# EAGLE board seb_v1_panelized1 (EAGLE 7.7.0)
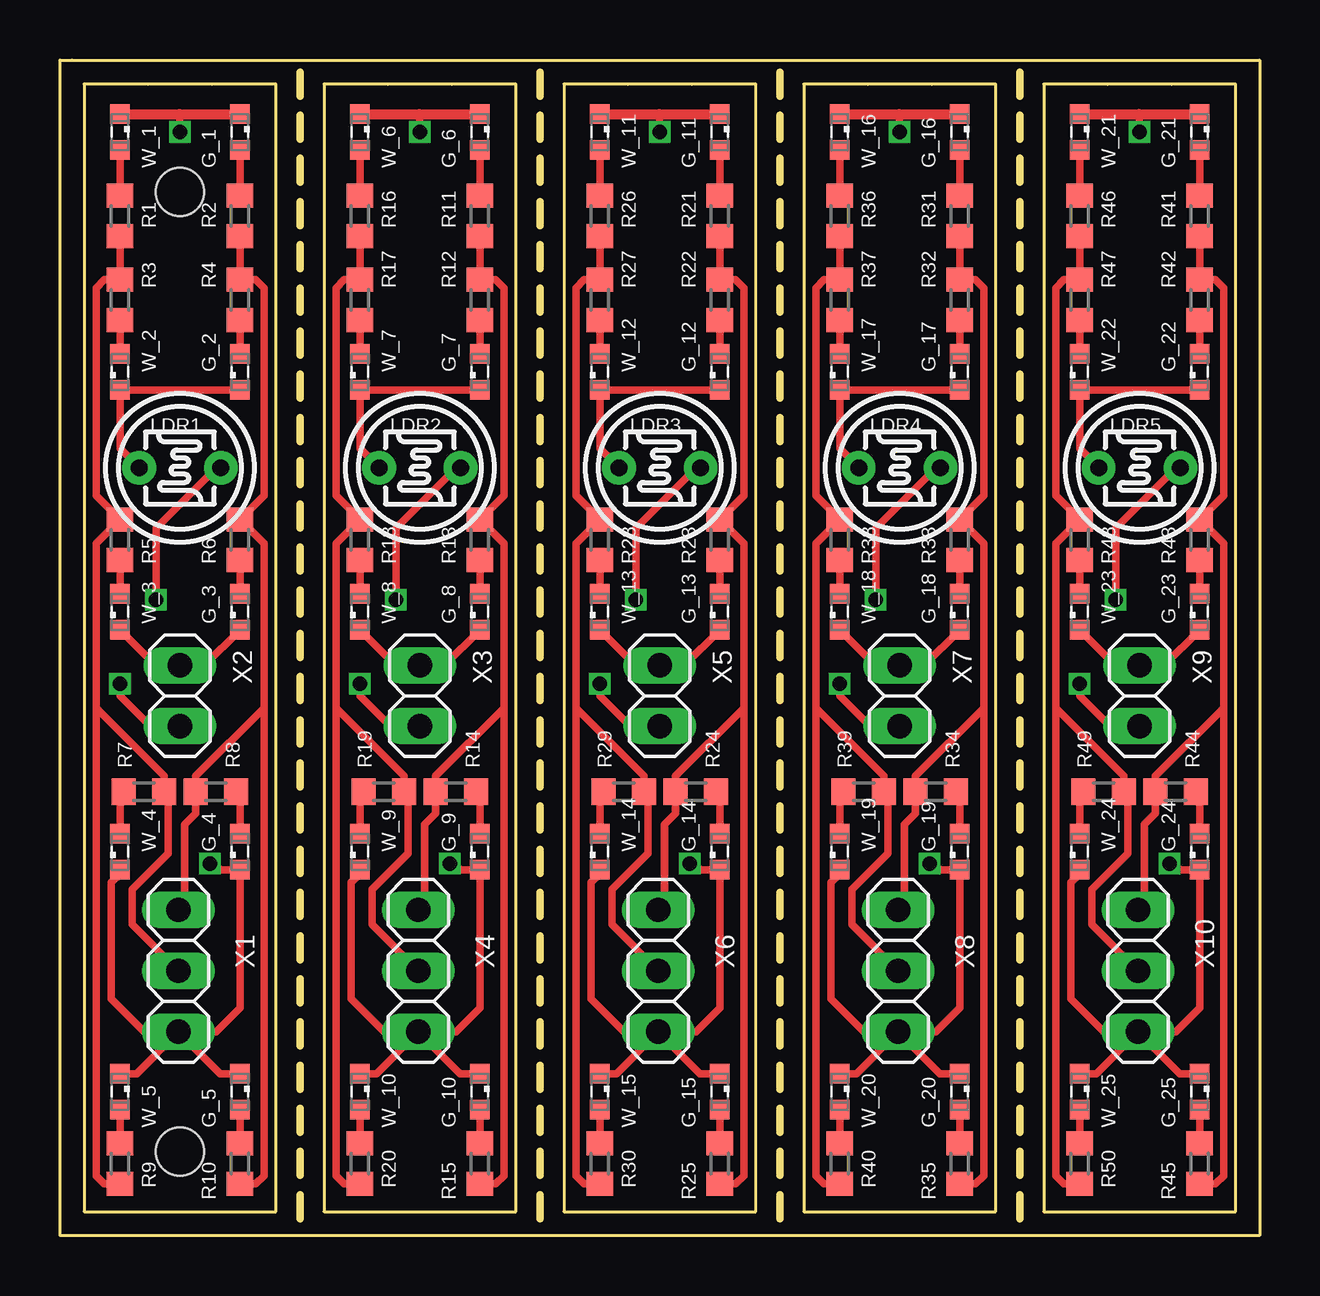
[diagram p0: board, top side]
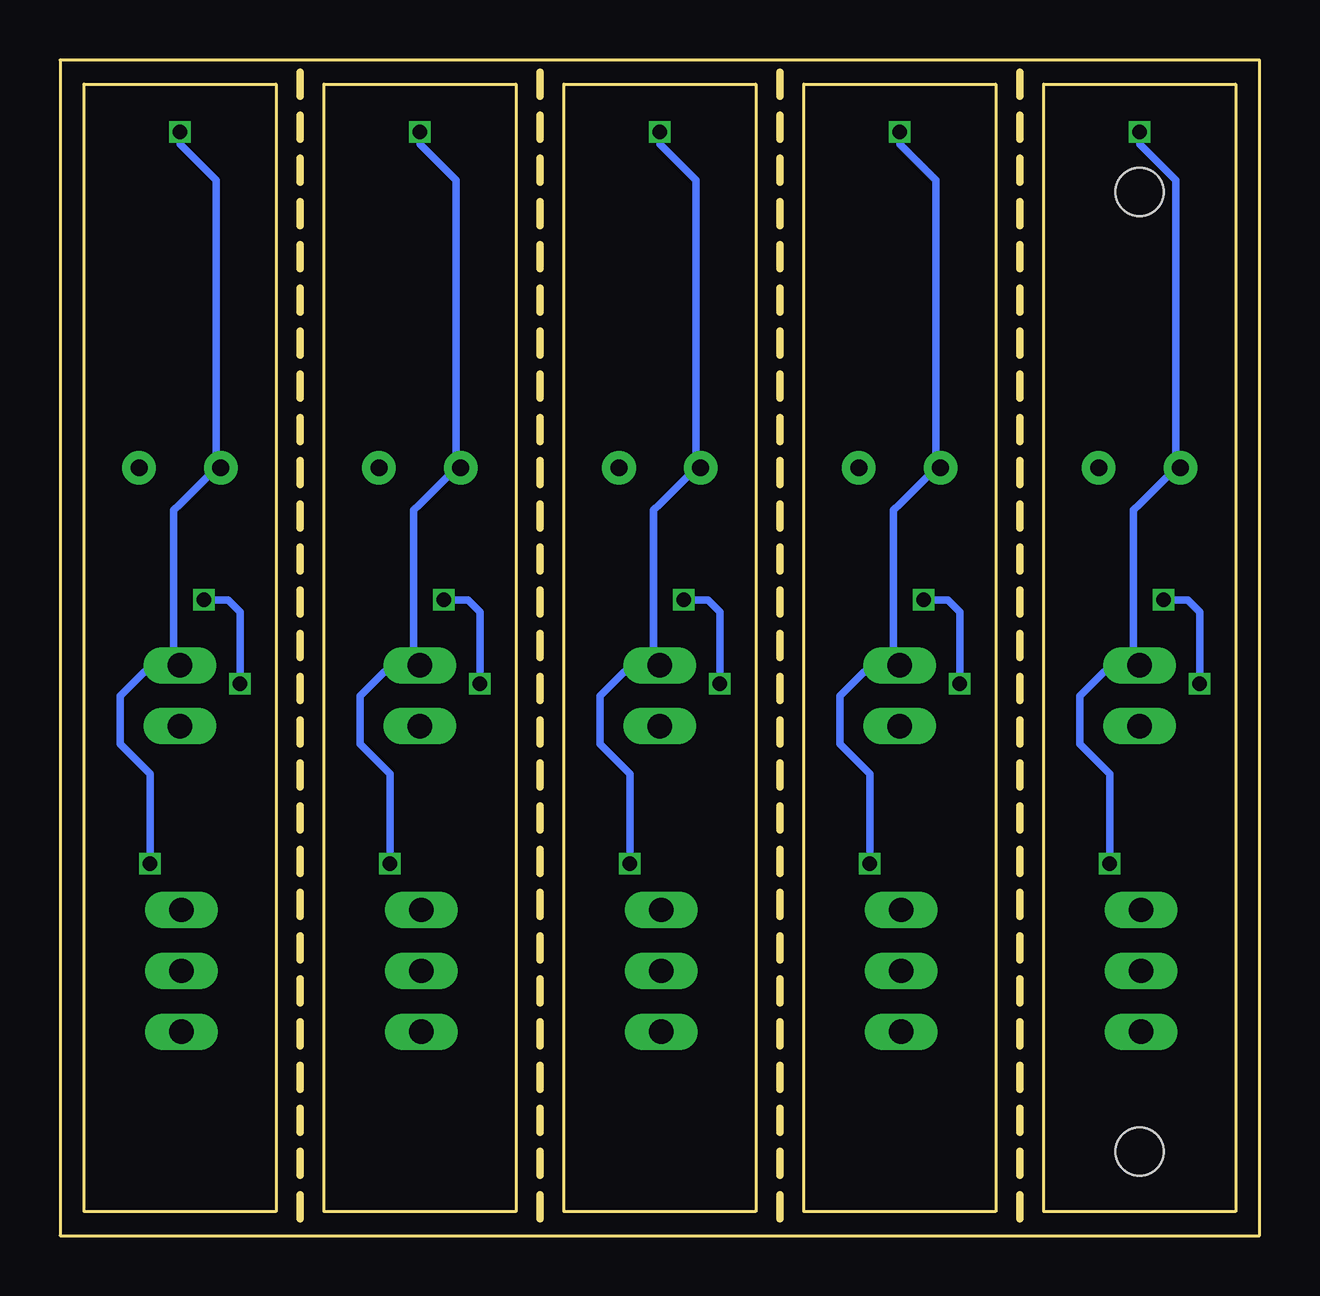
[diagram p1: board, bottom side, seen from below]

Size 50 x 49 mm. Coordinates in mm from the lower left corner, seen from the top.
Outline: 10,48.5 10,0.5
Outline: 20,48.5 20,0.5
Outline: 30,48.5 30,0.5
Outline: 40,48.5 40,0.5
Outline: 9,1 9,48 arc-1 1,48 1,1 9,1
Outline: 19,1 19,48 arc-1 11,48 11,1 19,1
Outline: 29,1 29,48 arc-1 21,48 21,1 29,1
Outline: 39,1 39,48 arc-1 31,48 31,1 39,1
Outline: 49,1 49,48 arc-1 41,48 41,1 49,1
Outline: 0.5,49 50,49 50,0 0,0 0,49 0.5,49
Copper layers (1*16): Top 0.035mm / dielectric 1.5mm / Bottom 0.035mm
Design rules "SeeedStudio_2layer_DRU_no_angle_20140221": minimum track width 6mil, minimum drill 12mil, track to track 6mil, track to pad 6mil, pad to pad 6mil, via to via 6mil, smd to smd 0mil, copper to edge 10mil, drill to drill 10mil, minimum pad ring 10mil, minimum via ring 6mil, stop-mask expansion 2mil, vias tented up to drill 100mil, thermal gap 10mil
Holes 2 mm at 5,43.5 5,3.5

## Footprints (pad centres in the part's own frame; a part is rotated, then mirrored left to right if it is on the bottom)
SML0603 = smd 0.8 x 0.8: A 0.75,0; C -0.75,0
T0-46-A10XX = drill 0.7 pad 1.4: 1 -1.7,0; 2 1.7,0
R0603 = smd 1 x 1.1: 1 -0.85,0; 2 0.85,0
1X03 = drill 1.016 long: 1 -2.54,0; 2 0,0; 3 2.54,0
1X02 = drill 1.016 long: 1 -1.27,0; 2 1.27,0

## Placement (x,y rotation side)
G_1  [SML0603]  7.5,46 270 top
G_2  [SML0603]  7.5,36 90 top
G_3  [SML0603]  7.5,26 90 top
G_4  [SML0603]  7.5,16 90 top
G_5  [SML0603]  7.5,6 270 top
G_6  [SML0603]  17.5,46 270 top
G_7  [SML0603]  17.5,36 90 top
G_8  [SML0603]  17.5,26 90 top
G_9  [SML0603]  17.5,16 90 top
G_10  [SML0603]  17.5,6 270 top
G_11  [SML0603]  27.5,46 270 top
G_12  [SML0603]  27.5,36 90 top
G_13  [SML0603]  27.5,26 90 top
G_14  [SML0603]  27.5,16 90 top
G_15  [SML0603]  27.5,6 270 top
G_16  [SML0603]  37.5,46 270 top
G_17  [SML0603]  37.5,36 90 top
G_18  [SML0603]  37.5,26 90 top
G_19  [SML0603]  37.5,16 90 top
G_20  [SML0603]  37.5,6 270 top
G_21  [SML0603]  47.5,46 270 top
G_22  [SML0603]  47.5,36 90 top
G_23  [SML0603]  47.5,26 90 top
G_24  [SML0603]  47.5,16 90 top
G_25  [SML0603]  47.5,6 270 top
LDR1  A1050_09  [T0-46-A10XX]  5,32 180 top
LDR2  A1050_09  [T0-46-A10XX]  15,32 180 top
LDR3  A1050_09  [T0-46-A10XX]  25,32 180 top
LDR4  A1050_09  [T0-46-A10XX]  35,32 180 top
LDR5  A1050_09  [T0-46-A10XX]  45,32 180 top
R1  [R0603]  2.5,42.5 90 top
R2  [R0603]  7.5,42.5 90 top
R3  [R0603]  2.5,39 270 top
R4  [R0603]  7.5,39 270 top
R5  [R0603]  2.5,29 270 top
R6  [R0603]  7.5,29 270 top
R7  [R0603]  3.5,18.5 180 top
R8  [R0603]  6.5,18.5 0 top
R9  [R0603]  2.5,3 90 top
R10  [R0603]  7.5,3 90 top
R11  [R0603]  17.5,42.5 90 top
R12  [R0603]  17.5,39 270 top
R13  [R0603]  17.5,29 270 top
R14  [R0603]  16.5,18.5 0 top
R15  [R0603]  17.5,3 90 top
R16  [R0603]  12.5,42.5 90 top
R17  [R0603]  12.5,39 270 top
R18  [R0603]  12.5,29 270 top
R19  [R0603]  13.5,18.5 180 top
R20  [R0603]  12.5,3 90 top
R21  [R0603]  27.5,42.5 90 top
R22  [R0603]  27.5,39 270 top
R23  [R0603]  27.5,29 270 top
R24  [R0603]  26.5,18.5 0 top
R25  [R0603]  27.5,3 90 top
R26  [R0603]  22.5,42.5 90 top
R27  [R0603]  22.5,39 270 top
R28  [R0603]  22.5,29 270 top
R29  [R0603]  23.5,18.5 180 top
R30  [R0603]  22.5,3 90 top
R31  [R0603]  37.5,42.5 90 top
R32  [R0603]  37.5,39 270 top
R33  [R0603]  37.5,29 270 top
R34  [R0603]  36.5,18.5 0 top
R35  [R0603]  37.5,3 90 top
R36  [R0603]  32.5,42.5 90 top
R37  [R0603]  32.5,39 270 top
R38  [R0603]  32.5,29 270 top
R39  [R0603]  33.5,18.5 180 top
R40  [R0603]  32.5,3 90 top
R41  [R0603]  47.5,42.5 90 top
R42  [R0603]  47.5,39 270 top
R43  [R0603]  47.5,29 270 top
R44  [R0603]  46.5,18.5 0 top
R45  [R0603]  47.5,3 90 top
R46  [R0603]  42.5,42.5 90 top
R47  [R0603]  42.5,39 270 top
R48  [R0603]  42.5,29 270 top
R49  [R0603]  43.5,18.5 180 top
R50  [R0603]  42.5,3 90 top
W_1  [SML0603]  2.5,46 270 top
W_2  [SML0603]  2.5,36 90 top
W_3  [SML0603]  2.5,26 90 top
W_4  [SML0603]  2.5,16 90 top
W_5  [SML0603]  2.5,6 270 top
W_6  [SML0603]  12.5,46 270 top
W_7  [SML0603]  12.5,36 90 top
W_8  [SML0603]  12.5,26 90 top
W_9  [SML0603]  12.5,16 90 top
W_10  [SML0603]  12.5,6 270 top
W_11  [SML0603]  22.5,46 270 top
W_12  [SML0603]  22.5,36 90 top
W_13  [SML0603]  22.5,26 90 top
W_14  [SML0603]  22.5,16 90 top
W_15  [SML0603]  22.5,6 270 top
W_16  [SML0603]  32.5,46 270 top
W_17  [SML0603]  32.5,36 90 top
W_18  [SML0603]  32.5,26 90 top
W_19  [SML0603]  32.5,16 90 top
W_20  [SML0603]  32.5,6 270 top
W_21  [SML0603]  42.5,46 270 top
W_22  [SML0603]  42.5,36 90 top
W_23  [SML0603]  42.5,26 90 top
W_24  [SML0603]  42.5,16 90 top
W_25  [SML0603]  42.5,6 270 top
X1  [1X03]  4.94,11.03 90 top
X2  [1X02]  5,22.5 90 top
X3  [1X02]  15,22.5 90 top
X4  [1X03]  14.94,11.03 90 top
X5  [1X02]  25,22.5 90 top
X6  [1X03]  24.94,11.03 90 top
X7  [1X02]  35,22.5 90 top
X8  [1X03]  34.94,11.03 90 top
X9  [1X02]  45,22.5 90 top
X10  [1X03]  44.94,11.03 90 top

## Library data of the parts
G_1-G_25 W_1-W_25 = led
LDR1-LDR5 = photo-elements
R1-R50 = rcl
X1-X10 = pinhead

## Nets
G_+: R2.1 R4.1 R6.1 R8.1 R10.1 X1.3
G_+1: R11.1 R12.1 R13.1 R14.1 R15.1 X4.3
G_+2: R21.1 R22.1 R23.1 R24.1 R25.1 X6.3
G_+3: R31.1 R32.1 R33.1 R34.1 R35.1 X8.3
G_+4: R41.1 R42.1 R43.1 R44.1 R45.1 X10.3
GND: G_1.C G_2.C G_3.C G_4.C G_5.C LDR1.2 W_1.C W_2.C W_3.C W_4.C W_5.C X1.1 X2.2
GND1: G_6.C G_7.C G_8.C G_9.C G_10.C LDR2.2 W_6.C W_7.C W_8.C W_9.C W_10.C X3.2 X4.1
GND2: G_11.C G_12.C G_13.C G_14.C G_15.C LDR3.2 W_11.C W_12.C W_13.C W_14.C W_15.C X5.2 X6.1
GND3: G_16.C G_17.C G_18.C G_19.C G_20.C LDR4.2 W_16.C W_17.C W_18.C W_19.C W_20.C X7.2 X8.1
GND4: G_21.C G_22.C G_23.C G_24.C G_25.C LDR5.2 W_21.C W_22.C W_23.C W_24.C W_25.C X9.2 X10.1
N$1: G_1.A R2.2
N$2: G_2.A R4.2
N$3: G_3.A R6.2
N$4: G_4.A R8.2
N$5: G_5.A R10.2
N$6: G_6.A R11.2
N$7: LDR1.1 X2.1
N$8: G_7.A R12.2
N$9: R1.2 W_1.A
N$10: R3.2 W_2.A
N$11: R5.2 W_3.A
N$12: R7.2 W_4.A
N$13: R9.2 W_5.A
N$14: G_8.A R13.2
N$15: G_9.A R14.2
N$16: G_10.A R15.2
N$17: R16.2 W_6.A
N$18: R17.2 W_7.A
N$19: R18.2 W_8.A
N$20: R19.2 W_9.A
N$21: R20.2 W_10.A
N$22: LDR2.1 X3.1
N$23: G_11.A R21.2
N$24: G_12.A R22.2
N$25: G_13.A R23.2
N$26: G_14.A R24.2
N$27: G_15.A R25.2
N$28: R26.2 W_11.A
N$29: R27.2 W_12.A
N$30: R28.2 W_13.A
N$31: R29.2 W_14.A
N$32: R30.2 W_15.A
N$33: LDR3.1 X5.1
N$34: G_16.A R31.2
N$35: G_17.A R32.2
N$36: G_18.A R33.2
N$37: G_19.A R34.2
N$38: G_20.A R35.2
N$39: R36.2 W_16.A
N$40: R37.2 W_17.A
N$41: R38.2 W_18.A
N$42: R39.2 W_19.A
N$43: R40.2 W_20.A
N$44: LDR4.1 X7.1
N$45: G_21.A R41.2
N$46: G_22.A R42.2
N$47: G_23.A R43.2
N$48: G_24.A R44.2
N$49: G_25.A R45.2
N$50: R46.2 W_21.A
N$51: R47.2 W_22.A
N$52: R48.2 W_23.A
N$53: R49.2 W_24.A
N$54: R50.2 W_25.A
N$55: LDR5.1 X9.1
W_+: R1.1 R3.1 R5.1 R7.1 R9.1 X1.2
W_+1: R16.1 R17.1 R18.1 R19.1 R20.1 X4.2
W_+2: R26.1 R27.1 R28.1 R29.1 R30.1 X6.2
W_+3: R36.1 R37.1 R38.1 R39.1 R40.1 X8.2
W_+4: R46.1 R47.1 R48.1 R49.1 R50.1 X10.2

## Tracks (layer width: path | path; a pad name or v marks a point on that pad's centre or on a via)
G_+
  Top 0.305: R2.1 R4.1 8.15,39.85 8.5,39.5 8.5,30.85 R6.1 8.5,28.85 8.5,22 | 8.5,22 5.65,19.15 R8.1 5.65,17.59 5.19,17.13 5.19,13.83 X1.3 | R10.1 8.15,2.15 8.5,2.5 8.5,22
G_+1
  Top 0.305: R11.1 R12.1 18.15,39.85 18.5,39.5 18.5,30.85 R13.1 18.5,28.85 18.5,22 | 18.5,22 15.65,19.15 R14.1 15.65,17.59 15.19,17.13 15.19,13.83 X4.3 | R15.1 18.15,2.15 18.5,2.5 18.5,22
G_+2
  Top 0.305: R21.1 R22.1 28.15,39.85 28.5,39.5 28.5,30.85 R23.1 28.5,28.85 28.5,22 | 28.5,22 25.65,19.15 R24.1 25.65,17.59 25.19,17.13 25.19,13.83 X6.3 | R25.1 28.15,2.15 28.5,2.5 28.5,22
G_+3
  Top 0.305: R31.1 R32.1 38.15,39.85 38.5,39.5 38.5,30.85 R33.1 38.5,28.85 38.5,22 | 38.5,22 35.65,19.15 R34.1 35.65,17.59 35.19,17.13 35.19,13.83 X8.3 | R35.1 38.15,2.15 38.5,2.5 38.5,22
G_+4
  Top 0.305: R41.1 R42.1 48.15,39.85 48.5,39.5 48.5,30.85 R43.1 48.5,28.85 48.5,22 | 48.5,22 45.65,19.15 R44.1 45.65,17.59 45.19,17.13 45.19,13.83 X10.3 | R45.1 48.15,2.15 48.5,2.5 48.5,22
GND  (via drill 0.6)
  Top 0.305: 4.99,46.75 v5,46 | G_2.C W_2.C 2.5,32.8 LDR1.2 | G_3.C 6.02,23.77 X2.2 3.98,23.77 W_3.C | v6.25,15.5 6.75,15.25 G_4.C 7.5,9.5 6.5,8.5 X1.1 | W_5.C 3.19,6.75 X1.1 | G_5.C 6.68,6.75 X1.1 | X1.1 3.5,8.5 2.14,9.86 2.14,14.72 2.5,15.07 W_4.C
  Top 0.406: X1.1 | W_1.C 4.99,46.75 G_1.C
  Bottom 0.305: v5,46 5,45.5 3.5,44 3.5,43 3.5,32.2 LDR1.2 3.5,32 5,30.5 5.27,30.23 5.27,24.04 X2.2 5.27,23.5 6.5,23.5 7.5,22.5 7.5,20.5 6.25,19.25 v6.25,15.5
GND1  (via drill 0.6)
  Top 0.305: 14.99,46.75 v15,46 | G_7.C W_7.C 12.5,32.8 LDR2.2 | G_8.C 16.02,23.77 X3.2 13.98,23.77 W_8.C | v16.25,15.5 16.75,15.25 G_9.C 17.5,9.5 16.5,8.5 X4.1 | W_10.C 13.19,6.75 X4.1 | G_10.C 16.68,6.75 X4.1 | X4.1 13.5,8.5 12.14,9.86 12.14,14.72 12.5,15.07 W_9.C
  Top 0.406: X4.1 | W_6.C 14.99,46.75 G_6.C
  Bottom 0.305: v15,46 15,45.5 13.5,44 13.5,43 13.5,32.2 LDR2.2 13.5,32 15,30.5 15.27,30.23 15.27,24.04 X3.2 15.27,23.5 16.5,23.5 17.5,22.5 17.5,20.5 16.25,19.25 v16.25,15.5
GND2  (via drill 0.6)
  Top 0.305: 24.99,46.75 v25,46 | G_12.C W_12.C 22.5,32.8 LDR3.2 | G_13.C 26.02,23.77 X5.2 23.98,23.77 W_13.C | v26.25,15.5 26.75,15.25 G_14.C 27.5,9.5 26.5,8.5 X6.1 | W_15.C 23.19,6.75 X6.1 | G_15.C 26.68,6.75 X6.1 | X6.1 23.5,8.5 22.14,9.86 22.14,14.72 22.5,15.07 W_14.C
  Top 0.406: X6.1 | W_11.C 24.99,46.75 G_11.C
  Bottom 0.305: v25,46 25,45.5 23.5,44 23.5,43 23.5,32.2 LDR3.2 23.5,32 25,30.5 25.27,30.23 25.27,24.04 X5.2 25.27,23.5 26.5,23.5 27.5,22.5 27.5,20.5 26.25,19.25 v26.25,15.5
GND3  (via drill 0.6)
  Top 0.305: 34.99,46.75 v35,46 | G_17.C W_17.C 32.5,32.8 LDR4.2 | G_18.C 36.02,23.77 X7.2 33.98,23.77 W_18.C | v36.25,15.5 36.75,15.25 G_19.C 37.5,9.5 36.5,8.5 X8.1 | W_20.C 33.19,6.75 X8.1 | G_20.C 36.68,6.75 X8.1 | X8.1 33.5,8.5 32.14,9.86 32.14,14.72 32.5,15.07 W_19.C
  Top 0.406: X8.1 | W_16.C 34.99,46.75 G_16.C
  Bottom 0.305: v35,46 35,45.5 33.5,44 33.5,43 33.5,32.2 LDR4.2 33.5,32 35,30.5 35.27,30.23 35.27,24.04 X7.2 35.27,23.5 36.5,23.5 37.5,22.5 37.5,20.5 36.25,19.25 v36.25,15.5
GND4  (via drill 0.6)
  Top 0.305: 44.99,46.75 v45,46 | G_22.C W_22.C 42.5,32.8 LDR5.2 | G_23.C 46.02,23.77 X9.2 43.98,23.77 W_23.C | v46.25,15.5 46.75,15.25 G_24.C 47.5,9.5 46.5,8.5 X10.1 | W_25.C 43.19,6.75 X10.1 | G_25.C 46.68,6.75 X10.1 | X10.1 43.5,8.5 42.14,9.86 42.14,14.72 42.5,15.07 W_24.C
  Top 0.406: X10.1 | W_21.C 44.99,46.75 G_21.C
  Bottom 0.305: v45,46 45,45.5 43.5,44 43.5,43 43.5,32.2 LDR5.2 43.5,32 45,30.5 45.27,30.23 45.27,24.04 X9.2 45.27,23.5 46.5,23.5 47.5,22.5 47.5,20.5 46.25,19.25 v46.25,15.5
N$1
  Top 0.305: R2.2 G_1.A
N$2
  Top 0.305: G_2.A R4.2
N$3
  Top 0.305: G_3.A R6.2
N$4
  Top 0.305: R8.2 7.5,18.35 G_4.A
N$5
  Top 0.305: G_5.A R10.2
N$6
  Top 0.305: R11.2 G_6.A
N$7  (via drill 0.6)
  Top 0.305: LDR1.1 6.5,32 4,29.5 v4,26.5 | v2.5,23 2.5,22.5 3.77,21.23 4.77,21.23 X2.1
  Bottom 0.305: v2.5,23 2.5,26 3,26.5 v4,26.5
N$8
  Top 0.305: G_7.A R12.2
N$9
  Top 0.305: W_1.A R1.2
N$10
  Top 0.305: W_2.A R3.2
N$11
  Top 0.305: W_3.A R5.2
N$12
  Top 0.305: W_4.A 2.5,18 2.65,18.15 R7.2
N$13
  Top 0.305: R9.2 W_5.A
N$14
  Top 0.305: G_8.A R13.2
N$15
  Top 0.305: R14.2 17.5,18.35 G_9.A
N$16
  Top 0.305: G_10.A R15.2
N$17
  Top 0.305: W_6.A R16.2
N$18
  Top 0.305: W_7.A R17.2
N$19
  Top 0.305: W_8.A R18.2
N$20
  Top 0.305: W_9.A 12.5,18 12.65,18.15 R19.2
N$21
  Top 0.305: R20.2 W_10.A
N$22  (via drill 0.6)
  Top 0.305: LDR2.1 16.5,32 14,29.5 v14,26.5 | v12.5,23 12.5,22.5 13.77,21.23 14.77,21.23 X3.1
  Bottom 0.305: v12.5,23 12.5,26 13,26.5 v14,26.5
N$23
  Top 0.305: R21.2 G_11.A
N$24
  Top 0.305: G_12.A R22.2
N$25
  Top 0.305: G_13.A R23.2
N$26
  Top 0.305: R24.2 27.5,18.35 G_14.A
N$27
  Top 0.305: G_15.A R25.2
N$28
  Top 0.305: W_11.A R26.2
N$29
  Top 0.305: W_12.A R27.2
N$30
  Top 0.305: W_13.A R28.2
N$31
  Top 0.305: W_14.A 22.5,18 22.65,18.15 R29.2
N$32
  Top 0.305: R30.2 W_15.A
N$33  (via drill 0.6)
  Top 0.305: LDR3.1 26.5,32 24,29.5 v24,26.5 | v22.5,23 22.5,22.5 23.77,21.23 24.77,21.23 X5.1
  Bottom 0.305: v22.5,23 22.5,26 23,26.5 v24,26.5
N$34
  Top 0.305: R31.2 G_16.A
N$35
  Top 0.305: G_17.A R32.2
N$36
  Top 0.305: G_18.A R33.2
N$37
  Top 0.305: R34.2 37.5,18.35 G_19.A
N$38
  Top 0.305: G_20.A R35.2
N$39
  Top 0.305: W_16.A R36.2
N$40
  Top 0.305: W_17.A R37.2
N$41
  Top 0.305: W_18.A R38.2
N$42
  Top 0.305: W_19.A 32.5,18 32.65,18.15 R39.2
N$43
  Top 0.305: R40.2 W_20.A
N$44  (via drill 0.6)
  Top 0.305: LDR4.1 36.5,32 34,29.5 v34,26.5 | v32.5,23 32.5,22.5 33.77,21.23 34.77,21.23 X7.1
  Bottom 0.305: v32.5,23 32.5,26 33,26.5 v34,26.5
N$45
  Top 0.305: R41.2 G_21.A
N$46
  Top 0.305: G_22.A R42.2
N$47
  Top 0.305: G_23.A R43.2
N$48
  Top 0.305: R44.2 47.5,18.35 G_24.A
N$49
  Top 0.305: G_25.A R45.2
N$50
  Top 0.305: W_21.A R46.2
N$51
  Top 0.305: W_22.A R47.2
N$52
  Top 0.305: W_23.A R48.2
N$53
  Top 0.305: W_24.A 42.5,18 42.65,18.15 R49.2
N$54
  Top 0.305: R50.2 W_25.A
N$55  (via drill 0.6)
  Top 0.305: LDR5.1 46.5,32 44,29.5 v44,26.5 | v42.5,23 42.5,22.5 43.77,21.23 44.77,21.23 X9.1
  Bottom 0.305: v42.5,23 42.5,26 43,26.5 v44,26.5
W_+
  Top 0.305: R1.1 R3.1 1.85,39.85 1.5,39.5 1.5,30.85 R5.1 1.5,28.85 1.5,22 | 1.5,22 4.35,19.15 R7.1 4.5,18.5 4.5,17 | X1.2 3,12.97 3,14.43 4.5,15.93 4.5,17 | R9.1 1.85,2.15 1.5,2.5 1.5,22 | 4.5,17 4.5,17.5
W_+1
  Top 0.305: R16.1 R17.1 11.85,39.85 11.5,39.5 11.5,30.85 R18.1 11.5,28.85 11.5,22 | 11.5,22 14.35,19.15 R19.1 14.5,18.5 14.5,17 | X4.2 13,12.97 13,14.43 14.5,15.93 14.5,17 | R20.1 11.85,2.15 11.5,2.5 11.5,22 | 14.5,17 14.5,17.5
W_+2
  Top 0.305: R26.1 R27.1 21.85,39.85 21.5,39.5 21.5,30.85 R28.1 21.5,28.85 21.5,22 | 21.5,22 24.35,19.15 R29.1 24.5,18.5 24.5,17 | X6.2 23,12.97 23,14.43 24.5,15.93 24.5,17 | R30.1 21.85,2.15 21.5,2.5 21.5,22 | 24.5,17 24.5,17.5
W_+3
  Top 0.305: R36.1 R37.1 31.85,39.85 31.5,39.5 31.5,30.85 R38.1 31.5,28.85 31.5,22 | 31.5,22 34.35,19.15 R39.1 34.5,18.5 34.5,17 | X8.2 33,12.97 33,14.43 34.5,15.93 34.5,17 | R40.1 31.85,2.15 31.5,2.5 31.5,22 | 34.5,17 34.5,17.5
W_+4
  Top 0.305: R46.1 R47.1 41.85,39.85 41.5,39.5 41.5,30.85 R48.1 41.5,28.85 41.5,22 | 41.5,22 44.35,19.15 R49.1 44.5,18.5 44.5,17 | X10.2 43,12.97 43,14.43 44.5,15.93 44.5,17 | R50.1 41.85,2.15 41.5,2.5 41.5,22 | 44.5,17 44.5,17.5